# Altium PCB PCB.PcbDoc (part 3 of 3)
Units mil, origin at the board's own origin, x right, y up, seen from the top; angles counter-clockwise.
Board outline 3149.61 x 3937.01 mil, 2 copper layers (Top Layer, Bottom Layer); 240 components, 174 nets, 738 pads, 225 vias.
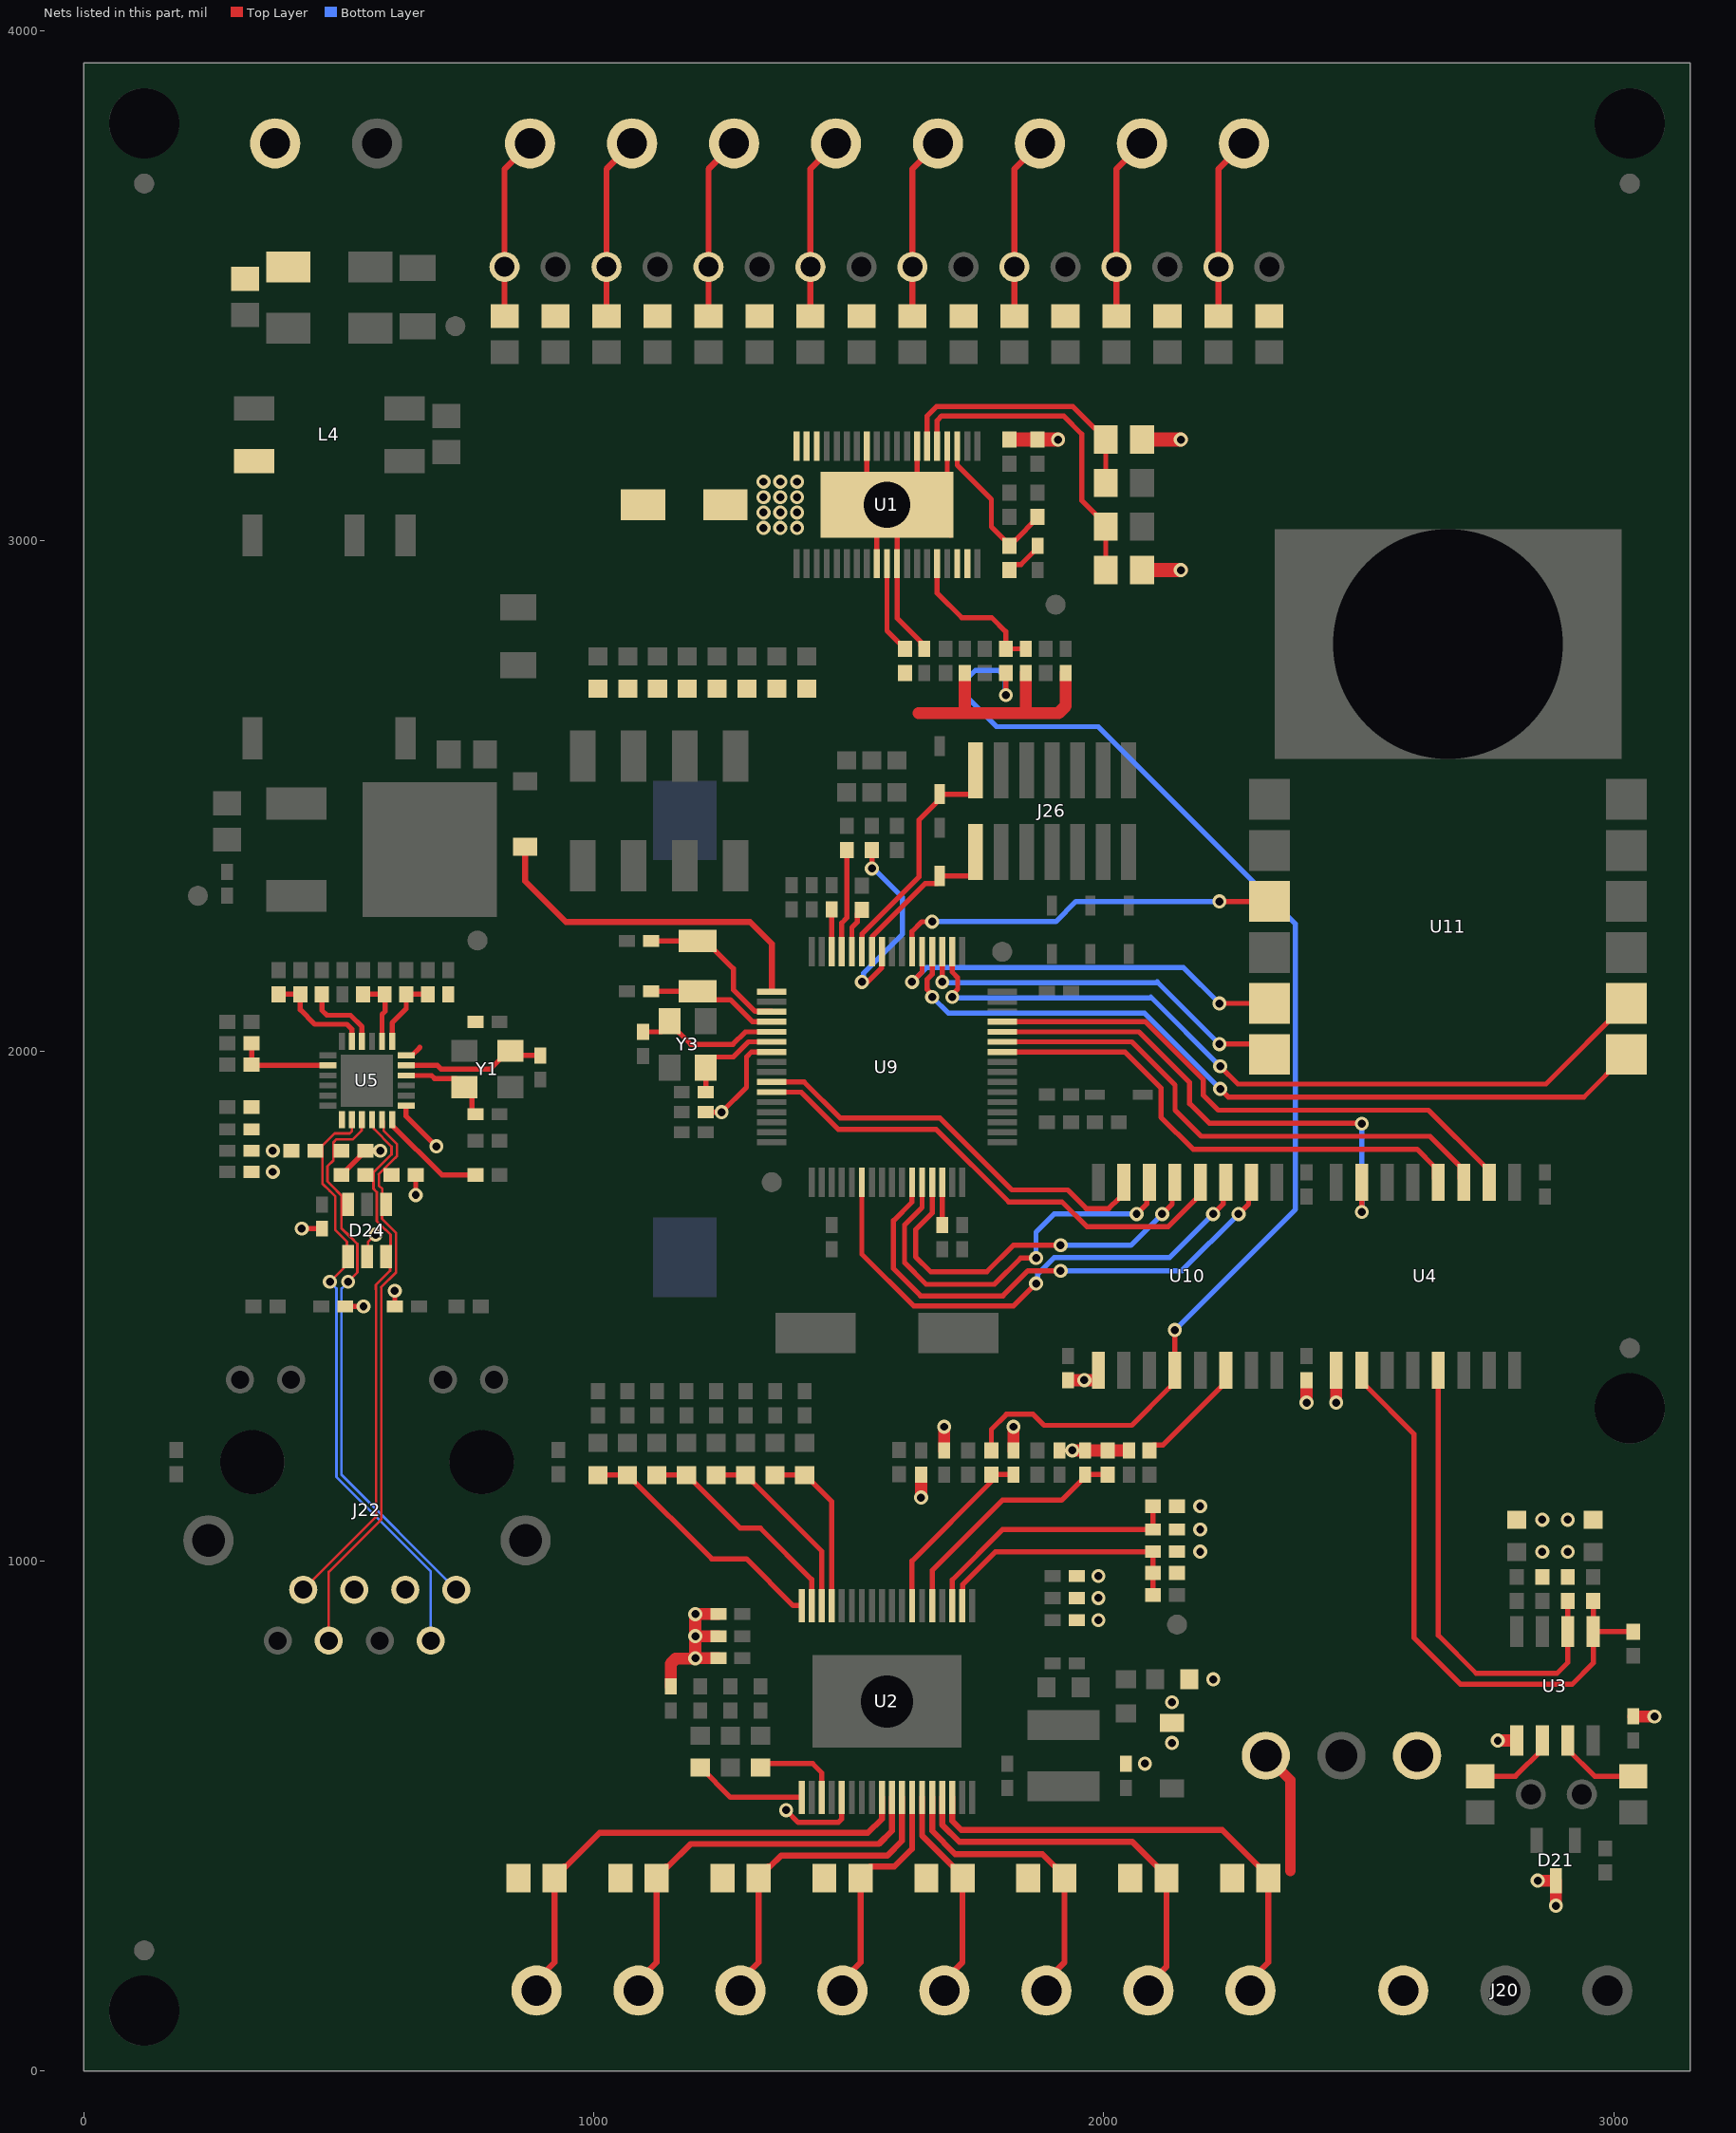
[diagram p3: the nets of this part, all layers, seen from the top]

## Via types
v1: diameter 27.56, hole 15.75, Top Layer to Bottom Layer, tented both sides, 225 vias

## Nets (pads, with @x,y where several pads share a name; then routed paths per layer and width w, separated by ;. In a path a pad name is that pad's centre, name@x,y a point inside that pad or via, vN(x,y) a via of type N, cw(c..) or ccw(c..) an arc to the next point about the centre after c; other vN are vias at no path point) (continued)
NetR10_1: R10.1 U1.29 | length 182
  Top Layer w10: U1.29@1574.8,2955.71 1574.8,2823.85 R10.1@1610.24,2788.42
NetR41_1: R41.1 U3.7 | length 167.5
  Top Layer w10: U3.7@2909.92,647.68 2909.92,630.45 2962.62,577.76 R41.1@3038.38,577.76
NetR45_1: R45.1 U3.6 | length 160.8
  Top Layer w10: R45.1@2738.19,577.76 2807.23,577.76 2859.92,630.45 U3.6@2859.92,647.68
NetR53_1: R53.1 R58.1 U5.14 | length 191.9
  Top Layer w10: R53.1@328.74,2014.76 R58.1@328.74,1973.1 330.38,1971.46 U5.14@478.34,1971.46
NetR54_1: R54.1 R59.1 U5.8 | length 137.7
  Top Layer w10: R54.1@547.24,2111.22 R59.1@589.57,2111.22 590.55,2110.23 590.55,2077.76 584.64,2071.84 U5.8@584.64,2018.7
NetR55_1: R55.1 R64.1 U5.7 | length 146.3
  Top Layer w10: U5.7@604.32,2018.7 604.32,2055.11 631.89,2082.68 R55.1@631.89,2111.22 R64.1@674.21,2111.22
NetR56_1: R56.1 R67.1 U5.11 | length 213.7
  Top Layer w10: R56.1@381.89,2111.22 R67.1@424.21,2111.22 424.21,2080.71 452.76,2052.17 515.75,2052.17 525.58,2042.33 U5.11@525.58,2018.7
NetR65_1: R65.1 U5.10 | length 152.2
  Top Layer w10: R65.1@466.53,2111.22 466.53,2079.73 476.38,2069.88 522.64,2069.88 545.27,2047.25 U5.10@545.27,2018.7
NetR68_2: R68.2 U5.24 | length 214.6
  Top Layer w10: U5.24@604.32,1865.16 604.32,1854.33 701.76,1756.89 R68.2@767.72,1756.89
NetR79_2: R79.2 U9.60 | length 91.3
  Top Layer w10: U9.60@1505.91,2194.41 1505.91,2242.13 1516.73,2252.95 1516.73,2260.95 1516.81,2261.03 1516.81,2268.78 R79.2@1525.59,2277.56
NRST: C65.1 U9.7 | length 213.2
  Top Layer w10: C65.1@1219.49,1879.92 v1(1250.47,1879.92) 1299.21,1928.66 1299.21,1988.19 1309.06,1998.03 U9.7@1348.9,1998.03
OSC32_IN: C68.1 U9.3 Y2.2 | length 318.4
  Top Layer w10: C68.1@1112.24,2215.55 Y2.2@1203.74,2215.55 1219.49,2215.55 1273.62,2161.42 1273.62,2120.08 1316.02,2077.68 1347.99,2077.68 U9.3@1348.9,2076.77
OSC32_OUT: C69.1 U9.4 Y2.1 | length 261.5
  Top Layer w10: C69.1@1112.24,2117.13 Y2.1@1203.74,2117.13 1220.4,2100.47 1267.64,2100.47 1311.02,2057.09 U9.4@1348.9,2057.09
OSC_IN: C70.1 U9.5 Y3.1 | length 290.6
  Top Layer w10: C70.1@1096.46,2037.43 1131.92,2037.43 Y3.1@1148.62,2054.13 ; Y3.1@1148.62,2058.07 Y3.1@1148.62,2054.13 ; U9.5@1348.9,2037.4 1297.24,2037.4 1272.64,2012.8 1189.96,2012.8 Y3.1@1148.62,2054.13
OSC_OUT: C79.2 U9.6 Y3.3 | length 200.7
  Top Layer w10: C79.2@1219.49,1919.29 Y3.3@1219.49,1967.52 1219.49,1971.46 1236.14,1988.11 1273.54,1988.11 1303.15,2017.72 U9.6@1348.9,2017.72
OUT1: C17.1 J15.2 U2.34 | length 950.3
  Top Layer w11.81: U2.34@1702.76,536.42 1702.76,490.16 1720.47,472.44 2232.36,472.44 2322.91,381.89 C17.1@2322.91,377.95 2322.91,212.86 2287.48,177.42 J15.2@2287.48,157.48
OUT2: C18.1 J15.1 U2.33 | length 774.6
  Top Layer w11.81: U2.33@1683.07,536.42 1683.07,482.28 1716.54,448.82 2055.98,448.82 2122.91,381.89 2122.91,204.57 2087.48,169.14 J15.1@2087.48,157.48
OUT3: C19.1 J16.2 U2.32 | length 601.2
  Top Layer w11.81: U2.32@1663.39,536.42 1663.39,470.47 1708.66,425.2 1879.6,425.2 1922.91,381.89 C19.1@1922.91,377.95 1922.91,212.86 1887.48,177.42 J16.2@1887.48,157.48
OUT4: C20.1 J16.1 U2.31 | length 426.4
  Top Layer w11.81: U2.31@1643.7,536.42 1643.7,461.1 1722.91,381.89 C20.1@1722.91,377.95 1722.91,212.86 1687.48,177.42 J16.1@1687.48,157.48
OUT5: C21.1 J17.2 U2.30 | length 463.6
  Top Layer w11.81: J17.2@1487.48,157.48 1487.48,177.42 1522.91,212.86 C21.1@1522.91,377.95 1522.91,381.89 1541.54,400.51 1589.49,400.51 1624.02,435.04 U2.30@1624.02,536.42
OUT6: C22.1 J17.1 U2.29 | length 634.7
  Top Layer w11.81: J17.1@1287.48,157.48 1287.48,177.42 1322.91,212.86 C22.1@1322.91,377.95 1322.91,381.89 1341.54,400.51 1345.47,400.51 1367.21,422.24 1575.79,422.24 1604.33,450.79 U2.29@1604.33,536.42
OUT7: C23.1 J18.2 U2.28 | length 803.5
  Top Layer w11.81: J18.2@1087.48,157.48 1087.48,177.42 1122.91,212.86 C23.1@1122.91,377.95 1122.91,381.89 1141.54,400.51 1145.47,400.51 1189.84,444.88 1559.06,444.88 1584.65,470.47 U2.28@1584.65,536.42
OUT8: C24.1 J18.1 U2.27 | length 969.9
  Top Layer w11.81: J18.1@887.48,157.48 887.48,177.42 922.91,212.86 C24.1@922.91,377.95 922.91,381.89 941.54,400.51 945.47,400.51 1011.5,466.54 1537.4,466.54 1564.96,494.09 U2.27@1564.96,536.42
OUT_EN: U9.22 U10.3 | length 1027.8
  Top Layer w10: U9.22@1525.59,1742.6 1525.59,1601.38 1626.97,1500 1823.23,1500 v1(1867.13,1543.9) ; v1(2214.37,1680.12) 2234.13,1699.87 2234.13,1736.88 U10.3@2239.37,1742.13
  Bottom Layer w10: v1(1867.13,1543.9) 1870.49,1547.26 1870.49,1562.41 1902.56,1594.49 2128.74,1594.49 v1(2214.37,1680.12)
PG: D9.C U2.19 | length 222.9
  Top Layer w10: D9.C@1208.66,594.49 1209.65,594.49 1267.72,536.42 U2.19@1407.48,536.42
PGND: C1.2 C2.2 C3.2 C6.2 C7.2 C8.2 C9.2 C10.2 C17.2 C18.2 C19.2 C20.2 C21.2 C22.2 C23.2 C24.2 C61.2 D25.C D27.1 J24.2 L4.2 TP4.1 | length 259.1
  Top Layer w20: TP4.1@2317.91,630.89 TP4.1@2317.91,618.11 2366.14,569.88 2366.14,391.73
pIN1: J8.1 J12.1 R11.1 | length 359.3
  Top Layer w11.81: R11.1@2224.8,3440.94 J8.1@2224.8,3537.51 2224.8,3729.53 J12.1@2274.8,3779.53
pIN2: J7.1 J12.2 R9.1 | length 359.3
  Top Layer w11.81: R9.1@2024.8,3440.94 J7.1@2024.8,3537.51 2024.8,3729.53 J12.2@2074.8,3779.53
pIN3: J6.1 J11.1 R8.1 | length 359.3
  Top Layer w11.81: R8.1@1824.8,3440.94 J6.1@1824.8,3537.51 1824.8,3729.53 J11.1@1874.8,3779.53
pIN4: J5.1 J11.2 R7.1 | length 359.3
  Top Layer w11.81: R7.1@1624.8,3440.94 J5.1@1624.8,3537.51 1624.8,3729.53 J11.2@1674.8,3779.53
pIN5: J4.1 J10.1 R6.1 | length 359.3
  Top Layer w11.81: R6.1@1424.8,3440.94 J4.1@1424.8,3537.51 1424.8,3729.53 J10.1@1474.8,3779.53
pIN6: J3.1 J10.2 R5.1 | length 359.3
  Top Layer w11.81: R5.1@1224.8,3440.94 J3.1@1224.8,3537.51 1224.8,3729.53 J10.2@1274.8,3779.53
pIN7: J2.1 J9.1 R2.1 | length 359.3
  Top Layer w11.81: R2.1@1024.8,3440.94 J2.1@1024.8,3537.51 1024.8,3729.53 J9.1@1074.8,3779.53
pIN8: J1.1 J9.2 R1.1 | length 359.3
  Top Layer w11.81: R1.1@824.8,3440.94 J1.1@824.8,3537.51 824.8,3729.53 J9.2@874.8,3779.53
R: R40.1 R46.2 U3.1 U4.10 | length 1174.6
  Top Layer w10: U4.10@2505.9,1374.02 2510.94,1368.98 2510.94,1345.36 2513.7,1342.6 2514.68,1342.6 2608.27,1249.02 2608.27,849.41 2699.8,757.87 2918.31,757.87 2959.92,799.49 U3.1@2959.92,861.22 ; R46.2@2959.92,921.26 U3.1@2959.92,861.22 ; R40.1@3038.38,861.22 U3.1@2959.92,861.22
RD_N: D24.6 J22.7 R52.1 U5.22 | length 1043.7
  Top Layer w5: J22.7@430.11,943.51 572.83,1086.23 572.62,1086.45 572.62,1532.03 572.4,1532.25 572.4,1540.9 600.39,1568.9 600.39,1588.78 D24.6@592.72,1596.46 601.38,1605.12 601.38,1639.56 591.58,1649.35 591.46,1649.35 574.47,1666.34 574.47,1723.22 567.91,1729.77 567.91,1761.81 603.16,1797.06 603.16,1812.51 568.36,1847.31 568.36,1861.75 U5.22@564.95,1865.16
RD_P: D24.1 J22.6 R51.1 U5.23 | length 1141.7
  Top Layer w5: J22.6@480.11,843.51 480.11,978.14 580.94,1078.97 580.94,1079.57 583.27,1081.91 583.27,1090.55 583.05,1090.77 583.05,1536.35 582.83,1536.57 612.2,1565.94 612.2,1643.13 595.8,1659.53 595.67,1659.53 584.65,1670.56 584.65,1690.75 D24.1@592.72,1698.82 592.72,1711.44 585.19,1718.96 585.19,1728.94 578.33,1735.81 578.33,1758.08 ; 578.15,1758.26 610.73,1790.85 ; U5.23@584.64,1865.16 588.04,1861.75 588.04,1843.06 613.68,1817.42 613.68,1793.44 610.91,1790.67 ; R51.1@603.35,1756.89 604.86,1756.89 R51.1@616.14,1768.17
RE: R43.2 U3.2 U4.13 | length 934.2
  Top Layer w10: U4.13@2655.9,1374.02 2655.9,853.96 2730.34,779.53 2888.78,779.53 2909.92,800.67 R43.2@2909.92,921.26
RE_LED: R75.1 U9.61 | length 203.4
  Top Layer w10: U9.61@1486.22,2194.41 1486.22,2250.98 1496.06,2260.83 R75.1@1496.06,2393.7
ROW0: D13.C D14.C U2.15 | length 346.3
  Top Layer w10: D14.C@1348.43,1161.25 D14.C@1355.46,1168.28 D13.C@1413.39,1168.28 1414.37,1168.28 1466.54,1116.11 U2.15@1466.54,912.4
ROW1: D15.C D16.C U2.16 | length 377.2
  Top Layer w10: D16.C@1239.59,1168.28 D15.C@1298.51,1168.28 ; D15.C@1297.52,1168.28 D15.C@1298.51,1168.28 ; U2.16@1446.85,912.4 1446.85,1018.95 1311.23,1154.57 1311.23,1155.56 D15.C@1298.51,1168.28
ROW2: D17.C D18.C U2.17 | length 439.4
  Top Layer w10: D18.C@1123.73,1168.28 D17.C@1181.66,1168.28 1182.65,1168.28 1286.95,1063.98 1326.77,1063.98 1427.17,963.58 U2.17@1427.17,912.4
ROW3: D19.C D20.C U2.18 | length 505.6
  Top Layer w10: D20.C@1007.87,1168.28 D19.C@1065.8,1168.28 1066.79,1168.28 1231.13,1003.94 1299.21,1003.94 1390.75,912.4 U2.18@1407.48,912.4
RS485_DE: U4.3 U9.43 | length 1062.5
  Top Layer w10: U9.43@1800.71,2017.72 2055.12,2017.72 2139.76,1933.07 2139.76,1883.86 2190.94,1832.68 2639.76,1832.68 2698.11,1774.33 2698.11,1749.92 U4.3@2705.9,1742.13
RS485_RE: U4.4 U9.42 | length 1008.5
  Top Layer w10: U9.42@1800.71,1998.03 2041.34,1998.03 2112.2,1927.17 2112.2,1870.08 2175.2,1807.09 2614.17,1807.09 2647.72,1773.54 2648.11,1773.54 2648.11,1749.92 U4.4@2655.9,1742.13
RS485_RX: U4.7 U9.44 | length 1036.1
  Top Layer w10: U9.44@1800.71,2037.4 2068.9,2037.4 2168.31,1937.99 2168.31,1896.65 2206.69,1858.27 v1@2502.95,1858.27 ; v1@2502.95,1850.39 v1@2505.9,1853.35 ; v1(2505.9,1684.06) U4.7@2505.9,1742.13
  Bottom Layer w10: v1(2505.9,1684.06) v1(2505.9,1857.28)
RS485_TX: U4.2 U9.45 | length 1117.4
  Top Layer w10: U9.45@1800.71,2057.09 2081.69,2057.09 2194.88,1943.9 2194.88,1913.39 2224.41,1883.86 2636.81,1883.86 2747.13,1773.54 2748.11,1773.54 2748.11,1749.92 U4.2@2755.9,1742.13
SCK: R16.1 R27.1 U10.12 | length 2476.1
  Top Layer w10: R27.1@1779.52,1216.54 1779.52,1257.87 1809.06,1287.4 1861.22,1287.4 1882.87,1265.75 2054.72,1265.75 2129.07,1340.1 2139.37,1350.39 U10.12@2139.37,1374.02 v1(2139.37,1452.76) ; v1@1807.82,2703.74 R16.1@1807.82,2741.17
  Bottom Layer w10: v1@1807.82,2703.74 1806.85,2704.71 1806.85,2732.52 1793.31,2746.06 1748.03,2746.06 1727.61,2725.64 1727.61,2697.88 1789.67,2635.83 1989.17,2635.83 2375.98,2249.02 2375.98,1689.37 v1(2139.37,1452.76)
  other v1: 1807.82,2697.88
SCK_CLT: C13.1 R16.2 U1.34 | length 296.8
  Top Layer w10: U1.34@1673.23,2955.71 1673.23,2897.64 1721.46,2849.41 1780.51,2849.41 1807.82,2822.1 R16.2@1807.82,2788.42 C13.1@1846.95,2788.42
SCK_VNI: C36.1 R27.2 U2.7 | length 350.8
  Top Layer w10: U2.7@1624.02,912.4 1624.02,1000 R27.2@1779.52,1155.51 ; R27.2@1779.52,1169.29 C36.1@1822.83,1169.29
SEL1: C38.1 R32.2 R84.1 U2.2 | length 526.5
  Top Layer w10: U2.2@1722.44,912.4 1723.35,913.31 1723.35,953.66 1787.8,1018.11 C38.1@2096.46,1018.11 R32.2@2096.46,976.58 R84.1@2096.46,933.07
SGND: C4.2 C5.2 C11.2 C12.2 C13.2 C14.2 C15.2 C16.2 C25.2 C28.2 C29.2 C30.2 C31.2 C32.2 C33.2 C34.2 C35.2 C36.2 C37.2 C38.2 C39.2 C40.2 C41.2 C43.2 C67.2 D1.C D2.C D3.C D4.C D5.C D6.C D7.C D8.C D12.A D21.3 D22.C D23.C D25.A J20.1 R4.1 R10.2 R13.1 R24.1 R32.1 R33.1 R34.1 R43.1 R44.1 R81.1 R83.1 TP5.1 U1.4 U1.7 U1.12 U1.17 U1.18 U1.19 U1.28 U1.30 U1.36 U1.37 U1.39 U2.23 U3.5 U4.9 U10.9 | length 2848
  Top Layer w10: v1(1377.07,511.06) 1400.93,487.2 1479.33,487.2 1486.22,494.09 U2.23@1486.22,536.42 ; U1.12@1535.43,3186.02 1535.43,3108.08 1572.64,3070.87 U1.39@1574.8,3070.87 ; U1.28@1555.12,2955.71 1555.12,3051.18 U1.39@1574.8,3070.87 ; U1.39@1633.86,3108.08 U1.7@1633.86,3186.02 ; C14.2@1648.05,2788.42 1641.24,2795.23 1641.24,2802.01 1594.49,2848.76 U1.30@1594.49,2955.71 1594.49,3051.18 U1.39@1574.8,3070.87 ; U1.4@1692.91,3186.02 1692.91,3111.22 1667.97,3086.28 1654.19,3086.28 U1.39@1638.78,3070.87 ; U1.39@1698.74,3010.91 U1.39@1638.78,3070.87 ; U1.37@1732.28,2955.71 U1.37@1732.28,2978.35 ; R81.1@1814.96,2942.91 1814.96,2944.88 1823.74,2953.66 1837.52,2953.66 1870.08,2986.22 C4.2@1870.08,2990.16 ; U1.39@1574.8,3070.87 U1.39@1638.78,3070.87
  Top Layer w23.62: C15.2@1150.59,753.94 1150.59,798.12 1160.77,808.3 1198.17,808.3 v1(1198.92,809.05) ; C28.2@1244.09,809.05 v1(1198.92,809.05) ; C29.2@1244.09,852.36 v1(1198.92,852.36) ; C30.2@1244.09,895.67 v1(1198.92,895.67) v1(1198.92,852.36) ; 1636.81,2662.4 1725.28,2662.4 ; v1(1641.73,1124.25) C37.2@1641.73,1169.29 ; C35.2@1687,1216.54 v1(1687,1263.03) ; C11.2@1727.61,2741.17 1727.61,2664.73 1725.28,2662.4 ; C36.2@1822.83,1216.54 v1(1822.83,1263.03) ; C13.2@1846.95,2741.17 1846.95,2664.86 1844.49,2662.4 ; C12.2@1925.2,2741.17 1925.2,2676.24 1911.36,2662.4 1844.49,2662.4 ; C67.2@1930.12,1354.33 v1(1961.72,1354.33) 1988.39,1354.33 1989.37,1355.32 U10.9@1989.37,1374.02 ; v1(1938.1,1216.54) C40.2@1963.58,1216.54 R34.1@2007.87,1216.54 C25.2@2049.41,1216.54 ; v1(2397.64,1310.27) C43.2@2397.64,1354.33 ; v1(2455.9,1310.27) U4.9@2455.9,1374.02 ; v1(2772.64,647.68) U3.5@2809.92,647.68 ; v1(2850.97,373.03) D21.3@2886.5,373.03 v1(2886.5,323.66) ; C41.2@3038.38,694.92 v1(3079.83,694.92) ; v1(1198.92,809.05) v1(1198.92,852.36) ; 1725.28,2662.4 1844.49,2662.4
  Top Layer w27.56: R4.1@1814.96,3198.82 R83.1@1870.08,3198.82 v1(1910.43,3198.82) ; C5.2@2096.46,2942.91 v1(2151.16,2942.91) ; R13.1@2096.46,3198.82 v1(2151.16,3198.82)
  other v1: 2080.81,602.36 2133.86,642.95 2133.86,722.67 2214.67,767.72 1989.28,883.86 1989.28,927.17 1989.28,970.47 2189.08,1018.11 2859.92,1017.72 2909.92,1017.72 2189.08,1061.62 2859.92,1080.71 2909.92,1080.71 2189.08,1107.09 1332.58,3025.69 1365.56,3025.69 1398.53,3025.69 1332.58,3055.81 1365.56,3055.81 1398.53,3055.81 1332.58,3085.93 1365.56,3085.93 1398.53,3085.93 1332.58,3116.05 1365.56,3116.05 1398.53,3116.05
SPI2_CS1: U9.27 U10.2 | length 1022.5
  Top Layer w10: U9.27@1624.02,1742.6 1624.02,1703.74 1587.6,1667.32 1587.6,1572.83 1640.75,1519.68 1802.17,1519.68 1851.38,1568.9 v1(1915.35,1568.9) ; v1(2264.37,1680.12) 2284.13,1699.87 2284.13,1736.88 U10.2@2289.37,1742.13
  Bottom Layer w10: v1(1915.35,1568.9) 2153.15,1568.9 v1(2264.37,1680.12)
SPI2_CS2: U9.28 U10.6 | length 804.1
  Top Layer w10: U9.28@1643.7,1742.6 1643.7,1693.37 1609.25,1658.92 1609.25,1584.65 1651.57,1542.32 1785.43,1542.32 1837.01,1593.9 v1(1867.13,1593.9) ; v1(2064.37,1680.12) 2084.13,1699.87 2084.13,1736.88 U10.6@2089.37,1742.13
  Bottom Layer w10: v1(1867.13,1593.9) 1867.13,1644.69 1902.56,1680.12 v1(2064.37,1680.12)
SPI2_MISO: U9.10 U10.7 | length 828.2
  Top Layer w10: U9.10@1348.9,1938.98 1412.4,1938.98 1483.27,1868.11 1679.13,1868.11 1819.88,1727.36 1929.13,1727.36 1965.55,1690.94 2009.84,1690.94 2029.61,1710.71 2031.57,1710.71 2039.37,1718.5 U10.7@2039.37,1742.13
SPI2_MOSI: U9.11 U10.4 | length 999.4
  Top Layer w10: U9.11@1348.9,1919.29 1406.5,1919.29 1479.33,1846.46 1670.97,1846.46 1813.68,1703.74 1918.31,1703.74 1966.54,1655.51 2126.38,1655.51 2189.37,1718.5 U10.4@2189.37,1742.13
SPI2_SCK: U9.29 U10.5 | length 774.5
  Top Layer w10: U9.29@1663.39,1742.6 1663.39,1682.12 1630.91,1649.64 1630.91,1596.46 1660.43,1566.93 1770.67,1566.93 1822.64,1618.9 v1(1915.35,1618.9) ; v1(2114.37,1680.12) 2134.13,1699.87 2134.13,1736.88 U10.5@2139.37,1742.13
  Bottom Layer w10: v1(1915.35,1618.9) 2053.15,1618.9 v1(2114.37,1680.12)
SPI3_CS: U9.50 U11.8 | length 1556.3
  Top Layer w10: v1(1702.76,2105.83) 1702.76,2110.58 1713.58,2121.41 1713.58,2143.7 1702.76,2154.53 U9.50@1702.76,2194.41 ; v1(2228.35,1969.73) 2263.03,1935.04 2867.13,1935.04 U11.8@3025.24,2093.15
  Bottom Layer w10: v1@1702.76,2103.65 2092.25,2103.65 ; 2092.25,2105.83 v1(2228.35,1969.73)
SPI3_MISO: U9.52 U11.7 | length 1574.4
  Top Layer w10: v1(1663.39,2105.83) 1663.39,2110.58 1653.54,2120.42 1653.54,2140.53 1663.39,2150.37 U9.52@1663.39,2194.41 ; v1(2228.35,1925.63) 2244.14,1909.84 ; 2244.14,1909.45 2941.54,1909.45 U11.7@3025.24,1993.15
  Bottom Layer w10: v1(1663.39,2105.83) 1695.39,2073.82 2080.16,2073.82 v1(2228.35,1925.63)
SPI3_MOSI: U9.53 U11.5 | length 809.1
  Top Layer w10: v1(1624.02,2135.35) 1643.7,2155.04 U9.53@1643.7,2194.41 ; v1(2226.81,2093.15) U11.5@2325.24,2093.15
  Bottom Layer w10: v1(1624.02,2135.35) 1652.05,2163.39 ; 1652.05,2163.32 2156.57,2163.32 ; 2156.57,2163.39 v1(2226.81,2093.15)
SPI3_SCK: U9.51 U11.6 | length 760.1
  Top Layer w10: v1(1683.07,2135.35) U9.51@1683.07,2194.41 ; v1(2226.81,2013.37) 2305.02,2013.37 U11.6@2325.24,1993.15
  Bottom Layer w10: v1@1683.07,2133.48 2104.83,2133.48 ; 2104.83,2135.35 v1(2226.81,2013.37)
SPM: R80.1 R81.2 U1.3 | length 317.4
  Top Layer w10: U1.3@1712.6,3186.02 1712.6,3148.62 1779.53,3081.69 1779.53,3027.56 R81.2@1814.96,2992.13 ; R81.2@1814.96,2990.16 R81.2@1814.96,2992.13 ; R80.1@1870.08,3047.24 1870.08,3045.28 1825.71,3000.91 1823.74,3000.91 R81.2@1814.96,2992.13
TD_N: D24.4 J22.2 R50.1 U5.20 | length 1178.8
  Top Layer w5: v1(482.28,1547.24) 515.75,1580.71 515.75,1625.98 493.11,1648.62 493.11,1714.42 481.92,1725.61 467.52,1740.01 467.52,1804.13 467.52,1813.98 491.63,1838.09 521.16,1838.09 525.58,1842.51 U5.20@525.58,1865.16
  Bottom Layer w5: v1(482.28,1547.24) 482.28,1546.88 495.08,1534.09 495.08,1164.4 680.11,979.36 J22.2@680.11,843.51
TD_P: D24.3 J22.1 R49.1 U5.21 | length 1102.8
  Top Layer w5: v1(517.91,1547.24) 536.16,1565.49 536.16,1621.76 523.08,1634.84 522.64,1634.84 504.92,1652.56 504.92,1716.76 486.07,1735.61 477.52,1744.16 477.52,1773.78 489.17,1785.43 489.17,1820.87 495.08,1826.77 527.56,1826.77 544.64,1843.85 544.64,1864.53 U5.21@545.27,1865.16
  Bottom Layer w5: v1(517.91,1547.24) 517.91,1541.14 512.09,1541.14 505.08,1534.13 505.08,1168.54 J22.1@730.11,943.51
TWARN: D11.C U2.21 | length 178.9
  Top Layer w10: D11.C@1326.77,594.49 1334.65,602.36 1429.13,602.36 1446.85,584.65 U2.21@1446.85,536.42
USART1_RX: D29.C J26.13 U9.59 | length 484.2
  Top Layer w10: U9.59@1525.59,2194.41 1526.21,2195.03 1526.21,2229.95 1637.8,2341.54 1637.8,2453.15 1678.15,2493.5 D29.C@1678.15,2503.35 1739.06,2503.35 1748.62,2512.91 J26.13@1748.62,2550.59
USART1_TX: D30.C J26.14 U9.58 | length 329.6
  Top Layer w10: U9.58@1545.28,2194.41 1546.18,2195.31 1546.18,2224.71 1649.89,2328.42 1673.31,2328.42 1678.15,2333.27 D30.C@1678.15,2343.11 1739.06,2343.11 1748.62,2352.68 J26.14@1748.62,2390.35
VBAT: D28.C U9.1 | length 696
  Top Layer w11.81: D28.C@865.16,2400.2 865.16,2332.68 944.88,2252.95 1306.1,2252.95 1348.9,2210.16 U9.1@1348.9,2116.14
VC: C5.1 R3.2 U1.5 | length 638.3
  Top Layer w10: U1.5@1673.23,3186.02 1673.23,3236.22 1682.09,3245.08 1921.26,3245.08 1956.69,3209.65 1956.69,3079.4 2003.94,3032.15 R3.2@2003.94,3028.22 C5.1@2003.94,2942.91
VCAP_1: C77.1 U9.30 | length 84.1
  Top Layer w10: C77.1@1683.07,1658.46 U9.30@1683.07,1742.6
VCAP_2: C78.1 U9.62 | length 83.2
  Top Layer w10: U9.62@1466.54,2194.41 C78.1@1466.54,2277.56
VCS: R12.2 R13.2 U1.6 | length 531.7
  Top Layer w10: U1.6@1653.54,3186.02 1653.54,3245.08 1672.24,3263.78 1938.98,3263.78 1981.38,3221.38 1985.31,3221.38 2003.94,3202.76 R13.2@2003.94,3198.82 R12.2@2003.94,3113.52
VDDA3V3: C45.1 C46.1 C48.1 C49.1 C50.1 C54.1 D24.5 J22.3 J22.5 L2.2 R49.2 R50.2 R51.2 R52.2 U5.1 U5.19 | length 366.7
  Top Layer w5: D24.5@555.32,1596.46 557,1598.14 557,1624.72 v1(572.05,1639.77)
  Top Layer w10: v1(427.16,1651.58) C54.1@466.54,1651.58 ; R52.2@504.92,1756.89 506.89,1756.89 515.67,1765.67 515.67,1767.64 541.42,1793.39 541.42,1795.36 R49.2@550.2,1804.14 ; C46.1@512.4,1499.02 v1(548.23,1499.02) ; C45.1@609.58,1499.02 v1(609.58,1529.53) ; U5.1@631.88,1892.72 631.88,1872.06 v1(690.94,1812.99) ; v1(650.59,1717.48) R51.2@650.59,1756.89
  other v1: 370.35,1762.8 370.35,1804.13 580.98,1804.14
VDDCR: C52.1 C53.1 U5.6 | length 33.3
  Top Layer w10: U5.6@631.88,1991.14 642.71,1991.14 658.61,2007.05
VNI_OUT_EN: R21.1 U10.14 | length 230
  Top Layer w10: R21.1@2089.56,1216.54 2089.56,1218.5 2098.34,1227.28 2116.26,1227.28 2239.37,1350.39 U10.14@2239.37,1374.02
WAKE: U9.54 U11.3 | length 765.5
  Top Layer w10: U9.54@1624.02,2194.41 1624.02,2234.25 1642.96,2253.19 1663.11,2253.19 v1(1663.39,2253.46) ; v1(2226.81,2293.15) U11.3@2325.24,2293.15
  Bottom Layer w10: v1(1663.39,2253.46) 1905.79,2253.46 1945.48,2293.15 v1(2226.81,2293.15)
WD: C40.1 R34.2 U2.5 | length 493.6
  Top Layer w10: U2.5@1663.39,912.4 1663.39,981.3 1801.18,1119.09 1917.32,1119.09 1963.58,1165.35 C40.1@1963.58,1169.29 R34.2@2007.87,1169.29
WD_EN: C39.1 R33.2 U2.3 | length 530.4
  Top Layer w10: U2.3@1702.76,912.4 1702.76,962.6 1801.77,1061.62 C39.1@2096.46,1061.62 R33.2@2096.46,1107.09
XTAL1: C56.2 U5.5 Y1.3 | length 284
  Top Layer w10: U5.5@631.88,1971.46 693.36,1971.46 700.25,1964.57 797.24,1964.57 832.68,2000 Y1.3@836.61,2000 845.47,1991.14 C56.2@894.68,1991.14
XTAL2: C55.1 U5.4 Y1.1 | length 185.7
  Top Layer w10: U5.4@631.88,1951.77 681.55,1951.77 687.54,1945.79 729.41,1945.79 760.83,1914.37 760.83,1882.79 C55.1@767.72,1875.98 C55.1@767.72,1875.98
YE_LED: R76.1 U9.57 | length 389.5
  Top Layer w10: v1@1536.43,2134.86 1564.06,2162.48 1564.06,2193.5 U9.57@1564.96,2194.41 ; v1(1545.27,2357.73) R76.1@1545.27,2393.7
  Bottom Layer w10: v1(1525.59,2135.35) 1528.81,2138.58 1528.81,2152.83 1605.31,2229.33 1605.31,2300.97 1548.55,2357.73 v1(1545.27,2357.73)
pads on no net: J22.4 J22.MH3 J22.MH4 J26.1 J26.2 J26.9 J26.10 J26.12 U1.32 U2.26 U2.35 U2.36 U4.5 U4.6 U4.11 U4.12 U5.15 U8.8 U9.2 U9.8 U9.17 U9.20 U9.26 U9.34 U9.37 U9.38 U9.FD1 U9.FD2 U11.2 U11.9

## Polygon pours and split planes (outlines as drawn)
GND on Top Layer "NONET_L-01_P-001" (solid, remove dead copper, pour order 38): 0,0 3149.61,0 3149.61,3937.01 0,3937.01
SGND on Top Layer "NONET_L-01_P-001" (solid, remove dead copper, pour order 41): 185.39,739.17 185.39,424.21 939.96,424.21 998.03,482.28 1407.48,482.28 1407.48,912.4 1179.13,1140.75 929.13,1140.75 929.13,739.17
VDDCR on Top Layer "NONET_L-01_P-001" (solid, remove dead copper, pour order 2): 631.88,1991.14 706.69,1991.14 706.69,1998.03 706.69,2045.28 783.46,2045.27 783.46,2069.88 726.38,2126.97 702.76,2126.97 702.76,2085.63 661.42,2085.63 631.88,2056.09
PGND on Top Layer "NONET_L-01_P-001" (solid, remove dead copper, pour order 11): 481.14,3937.01 481.14,3801.18 774.8,3801.18 774.8,3417.32 2374.8,3417.32 2374.8,3937.01
EARTH on Top Layer "NONET_L-01_P-001" (solid, remove dead copper, pour order 36): 167.32,1185.65 167.32,1154.53 183.07,1138.78 183.07,739.17 929.13,739.17 929.13,1138.78 943.9,1153.54 943.9,1185.65
+5V_VNI on Top Layer "NONET_L-01_P-001" (solid, remove dead copper, pour order 35): 2073.82,850.39 2223.43,1000 2223.43,1252.41 2326.77,1339.02 2326.77,1455.71 2305.12,1477.36 2029.53,1477.36 1937.99,1385.83 1909.45,1385.83 1909.45,1449.8 2010.83,1551.18 2757.87,1551.18 2819.88,1489.17 2819.88,1337.6 2793.31,1337.6 2793.31,1408.46 2772.64,1429.13 2424.21,1429.13 2372.05,1376.97 2372.05,1301.18 2575.79,1097.44 2575.79,835.63 2675.2,736.22 2925.2,736.22 3017.72,828.74 3055.12,828.74 3055.12,754.92 3009.84,709.65 3009.84,679.13 3025.59,663.39 3055.12,663.39 3055.12,618.11 2947.83,618.11 2947.83,677.17 2931.1,693.9 2776.57,693.9 2669.29,586.61 2255.91,586.61 2255.91,810.04 1975.39,810.04 1975.39,822.83 1922.24,822.83 1909.45,810.04 1888.78,810.04 1888.78,850.39
+5V_VNI on Top Layer "NONET_L-01_P-001" (solid, remove dead copper, pour order 33): 1195.87,738.69 1279.52,822.34 1407.48,822.34 1407.48,818.41 1407.48,738.69
SGND on Top Layer "NONET_L-01_P-001" (solid, remove dead copper, pour order 28): 1399.36,3134.23 992.13,2751.19 992.13,2736.22 1472.44,2736.22 1495.08,2758.86 1594.49,2758.86 1703.74,2649.61 1615.16,2649.61 1577.76,2687.01 928.15,2687.01 928.15,2946.85 1086.61,2946.85 1273.99,3134.23
SGND on Top Layer "NONET_L-01_P-001" (solid, remove dead copper, pour order 40): 1703.74,3135.83 1764.76,3074.8 1764.76,3022.64 1789.37,2998.03 1789.37,2969.49 1800.2,2958.66 1828.74,2958.66 1828.74,2927.17 1796.26,2927.17 1764.76,2958.66 1764.76,2994.09 1738.19,2994.09 1738.19,2927.17 1706.69,2927.17 1706.69,3003.94 1703.74,3006.89
PGND on Top Layer "NONET_L-01_P-001" (solid, remove dead copper, pour order 17): 490.16,3132.87 490.16,3298.23 748.41,3298.23 748.41,2970.47 1069.88,2970.47 1139.76,3040.35 1139.76,3132.87 936.02,3336.61 784.45,3336.61 784.45,3361.22 394.68,3361.22 394.69,3132.87
SGND on Top Layer "NONET_L-01_P-001" (solid, remove dead copper, pour order 37): 1440.48,3135.83 1158.19,3135.83 1047.62,3235.24 1418.01,3235.24 1440.48,3212.77
+5V_VNI on Top Layer "NONET_L-01_P-001" (solid, remove dead copper, pour order 34): 1992.13,648.62 1992.13,707.68 1916.34,707.68 1916.34,1000.99 1793.31,1000.99 1736.22,943.9 1736.22,683.07 1770.67,648.62
SGND on Top Layer "NONET_L-01_P-001" (solid, remove dead copper, pour order 32): 1931.1,1000.99 2071.85,1000.99 2071.85,900.59 2043.31,872.05 1931.1,872.05
SGND on Top Layer "NONET_L-01_P-001" (solid, remove dead copper, pour order 31): 2127.95,1121.06 2127.95,962.6 2153.54,962.6 2203.74,1012.8 2203.74,1121.06
SGND on Top Layer "NONET_L-01_P-001" (solid, remove dead copper, pour order 30): 2233.27,788.39 2149.61,788.39 2149.61,764.76 2080.71,695.87 2080.71,667.32 2031.5,618.11 2031.5,586.61 2233.27,586.61
SGND on Top Layer "NONET_L-01_P-001" (solid, remove dead copper, pour order 29): 2791.34,1062.99 2846.46,1062.99 2846.46,952.76 2923.5,952.76 2923.5,1062.99 2978.62,1062.99 2978.62,1098.43 2791.34,1098.43
SGND on Top Layer "NONET_L-01_P-001" (solid, remove dead copper, pour order 25): 1391.73,3214.57 1442.91,3214.57 1442.91,3134.84 1391.73,3134.84
SGND on Top Layer "NONET_L-01_P-001" (solid, remove dead copper, pour order 24): 1159.57,3135.83 1703.74,3135.83 1703.74,3006.89 1159.57,3006.89
PGND on Top Layer "NONET_L-01_P-001" (solid, remove dead copper, pour order 13): -5.91,3942.91 -5.91,5.91 2381.57,5.91 2381.57,411.42 175.19,411.42 175.19,3423.23 368.9,3423.23 368.9,3942.91
VDDA3V3 on Top Layer "NONET_L-01_P-001" (solid, remove dead copper, pour order 9): 615.16,1898.62 615.16,1866.14 677.16,1804.14 687.99,1804.14 687.99,1858.27 647.64,1898.62
5V on Top Layer "NONET_L-01_P-001" (solid, remove dead copper, pour order 18): 350.39,2551.18 308.07,2508.86 308.07,2461.61 243.11,2461.61 243.11,2319.88 343.5,2319.88 358.27,2334.65 475.39,2334.65 475.39,2273.62 200.79,2273.62 200.79,2654.53 350.39,2654.53
VDDA3V3 on Top Layer "NONET_L-01_P-001" (solid, remove dead copper, pour order 0): 312.99,1903.54 350.39,1903.54 414.37,1839.57 437.99,1839.57 474.41,1875.98 505.9,1875.98 505.9,1852.36 487.2,1852.36 463.58,1828.74 427.17,1828.74 422.24,1823.82 422.24,1787.4 383.86,1749.02 312.99,1749.02
NetC62_2 on Top Layer "NONET_L-01_P-001" (solid, remove dead copper, pour order 5): 589.57,3197.83 738.19,3197.83 738.19,2970.47 663.39,2970.47 589.57,2970.47
NetC60_1 on Top Layer "NONET_L-01_P-001" (solid, remove dead copper, pour order 16): 502.95,3284.45 738.19,3284.45 738.19,3218.5 567.91,3218.5 567.91,2946.85 687.99,2946.85 918.31,2946.85 918.31,2834.65 758.86,2834.65 502.95,2834.65
NetC61_1 on Top Layer "NONET_L-01_P-001" (solid, remove dead copper, pour order 4): 288.39,3466.54 447.83,3466.54 447.83,3381.89 373.03,3381.89 373.03,3236.22 288.39,3236.22
PGND on Top Layer "NONET_L-01_P-001" (solid, remove dead copper, pour order 6): 481.14,3487.2 481.14,3937.01 0,3937.01 0,3132.87 481.14,3132.87 481.14,3214.57 266.73,3214.57 266.73,3487.2
NetF1_1 on Top Layer "NONET_L-01_P-001" (solid, remove dead copper, pour order 7): 501.97,3779.53 756.89,3779.53 756.89,3509.84 619.09,3509.84 619.09,3618.11 501.97,3618.11
24V on Top Layer "NONET_L-01_P-001" (solid, remove dead copper, pour order 8): 501.97,3597.44 598.43,3597.44 598.43,3489.17 756.89,3489.17 756.89,3385.83 501.97,3385.83
SGND on Bottom Layer "NONET_L-01_P-001" (solid, remove dead copper, pour order 21): 1225.37,3386.81 3149.61,3386.81 3149.61,0 1025.59,0 1025.59,1452.76 3021.65,1452.76 3021.65,2807.09 1225.37,2807.09
GND on Bottom Layer "NONET_L-01_P-001" (solid, remove dead copper, pour order 23): 181.1,3386.81 1225.37,3386.81 1225.37,2807.09 3021.65,2807.09 3021.65,1452.76 1025.59,1452.76 181.1,1452.76
EARTH on Bottom Layer "NONET_L-01_P-001" (solid, remove dead copper, pour order 39): 181.09,1452.76 181.09,815.94 1025.59,815.94 1025.59,1452.76
24V on Bottom Layer "NONET_L-01_P-001" (solid, remove dead copper, pour order 19): 3149.61,3937.01 0,3937.01 0,633.86 0,0 1025.59,0 1025.59,633.86 1720.47,633.86 1720.47,814.96 181.1,814.96 181.1,3386.81 2070.87,3386.81 3149.61,3386.81
VDDA3V3 on Bottom Layer "NONET_L-01_P-001" (solid, remove dead copper, pour order 3): 370.35,1817.91 687.99,1817.91 687.99,835.35 370.35,835.35

## Keep-outs
Keep-Out Layer:
  the board outline again, w10

## Silkscreen, mask and mechanical layers (free items; w line width, h text height)
Top Overlay:
  drawing of 173 lines, arcs and shapes, not listed
  text "INPUTS" at 2572.83,3836.34 h59.06
  text "IN1" at 2873.87,3644.14 h59.06 r90
  text "IN8" at 2465.06,3642.64 h59.06 r90
  text "IN4" at 2698.59,3642.83 h59.06 r90
  text "IN3" at 2757.49,3642.8 h59.06 r90
  text "IN2" at 2815.68,3642.53 h59.06 r90
  text "IN7" at 2523.03,3641.68 h59.06 r90
  text "IN6" at 2581.93,3642.39 h59.06 r90
  text "IN5" at 2640.62,3642.34 h59.06 r90
  text "J24" at 73.82,3633.58 h59.06
  text "24V" at 162.74,3432.5 h59.06 r90
  text "GND" at 103.68,3417.1 h59.06 r90
  text "24V" at 747.35,3295.28 h59.06 r90
  text "INPUTS LEDS" at 977.36,2911.14 h59.06
  text "IN8" at 1026.6,2805.09 h59.06 r90
  text "IN7" at 1084.58,2805.09 h59.06 r90
  text "IN6" at 1143.48,2805.09 h59.06 r90
  text "IN5" at 1202.16,2805.09 h59.06 r90
  text "IN4" at 1260.14,2805.09 h59.06 r90
  text "IN3" at 1319.04,2805.09 h59.06 r90
  text "IN2" at 1377.23,2805.09 h59.06 r90
  text "IN1" at 1435.42,2805.09 h59.06 r90
  text "SWI" at 1848.88,2617.84 h59.06
  text "GPIO" at 1391.02,2406.62 h59.06 r90
  text "USER LEDS" at 1455,2355.37 h59.06 r90
  text "5V" at 127.95,2285.6 h59.06
  text "IEEE 802.15.4" at 2513.78,2227.09 h59.06
  text "3V3" at 802.94,2197.89 h59.06
  text "TRANSCEIVER" at 2490.16,2176.89 h59.06
  text "USER BUTTON" at 1385.59,1532.21 h59.06
  text "TX" at 2828.81,1131.89 h59.06 r90
  text "RX" at 2978.81,1128.73 h59.06 r90
  text "OUT8" at 1026.85,987.62 h59.06 r90
  text "OUT7" at 1085.2,987.62 h59.06 r90
  text "OUT6" at 1143.55,987.62 h59.06 r90
  text "OUT5" at 1201.91,987.62 h59.06 r90
  text "OUT4" at 1260.26,987.62 h59.06 r90
  text "OUT3" at 1318.61,987.62 h59.06 r90
  text "OUT2" at 1376.96,987.62 h59.06 r90
  text "OUT1" at 1435.31,987.62 h59.06 r90
  text "OUTPUTS LEDS" at 973.43,927.88 h59.06
  text "RT_EN" at 2471.46,901.18 h59.06
  text "5V_VNI" at 2171.26,861.32 h59.06
  text "J21" at 2455,786.42 h59.06 r90
  text "ETH 10/100 MBPS" at 323.82,710.36 h59.06
  text "PGND" at 2242.65,690.67 h59.06
  text "GND" at 2409.64,690.67 h59.06
  text "SGND" at 2539.4,690.67 h59.06
  text "LUCAS S. KIRSCHNER" at 236.22,616.32 h59.06
  text "FIUBA - CESE - 24Co2025" at 236.22,567.64 h59.06
  text "MEC V1.0" at 236.28,517.44 h59.06
  text "PG" at 1227.55,470.47 h59.06 r90
  text "FL" at 1286.61,470.47 h59.06 r90
  text "TW" at 1345.66,470.47 h59.06 r90
  text "GND" at 2540.85,441.72 h59.06 r90
  text "A" at 2599.91,440.71 h59.06 r90
  text "B" at 2658.26,441.47 h59.06 r90
  text "RS485" at 2474.68,310.04 h59.06 r90
  text "OUT1" at 736.41,217.59 h59.06 r90
  text "OUT8" at 327.95,216.09 h59.06 r90
  text "OUT6" at 444.65,215.85 h59.06 r90
  text "OUT5" at 503,215.79 h59.06 r90
  text "OUT4" at 561.36,216.28 h59.06 r90
  text "OUT3" at 619.71,216.26 h59.06 r90
  text "OUT2" at 678.06,215.98 h59.06 r90
  text "OUT7" at 386.3,215.14 h59.06 r90
  text "OUTPUTS" at 382.79,64.69 h59.06

## Text inside footprints (layer, text, board x,y; h text height)
J26: Top Overlay "1" at 2034.53,2627.87 h27.56 r270